# EAGLE board LS7366R_TestPRojectMultiple (EAGLE 7.5.0)
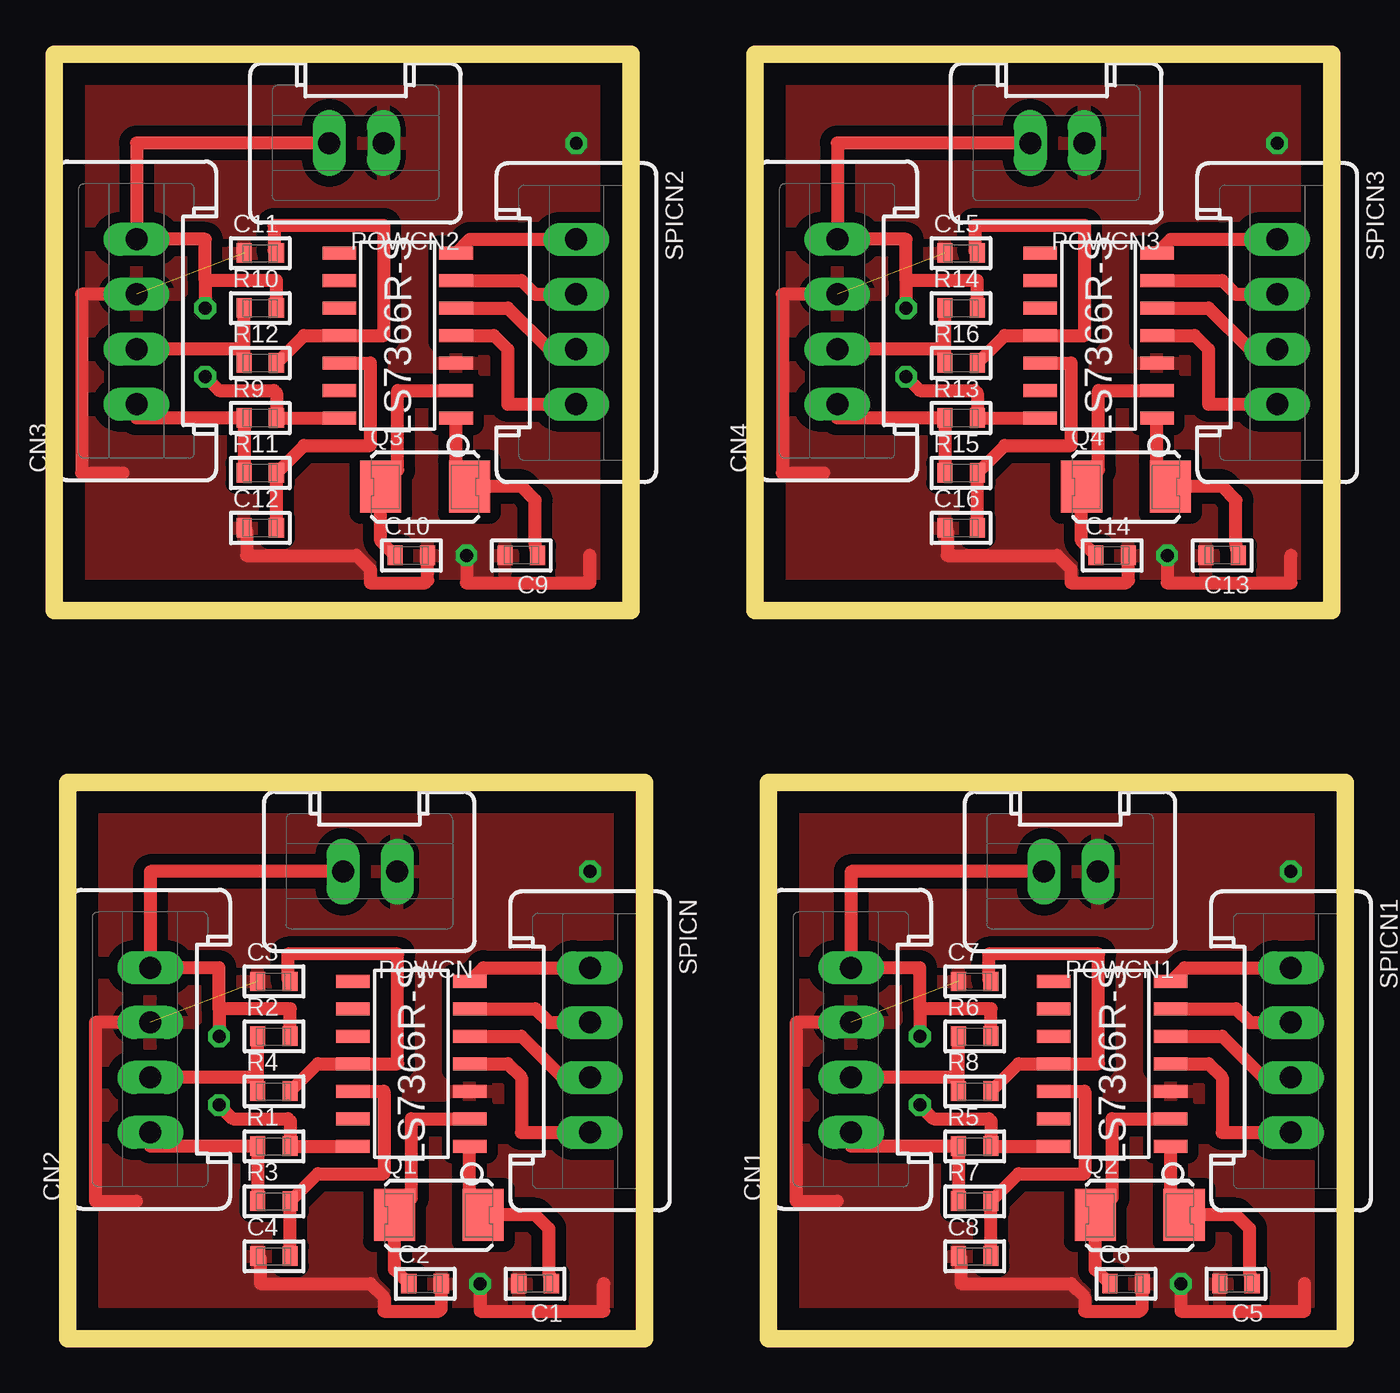
[diagram p0: board, top side]
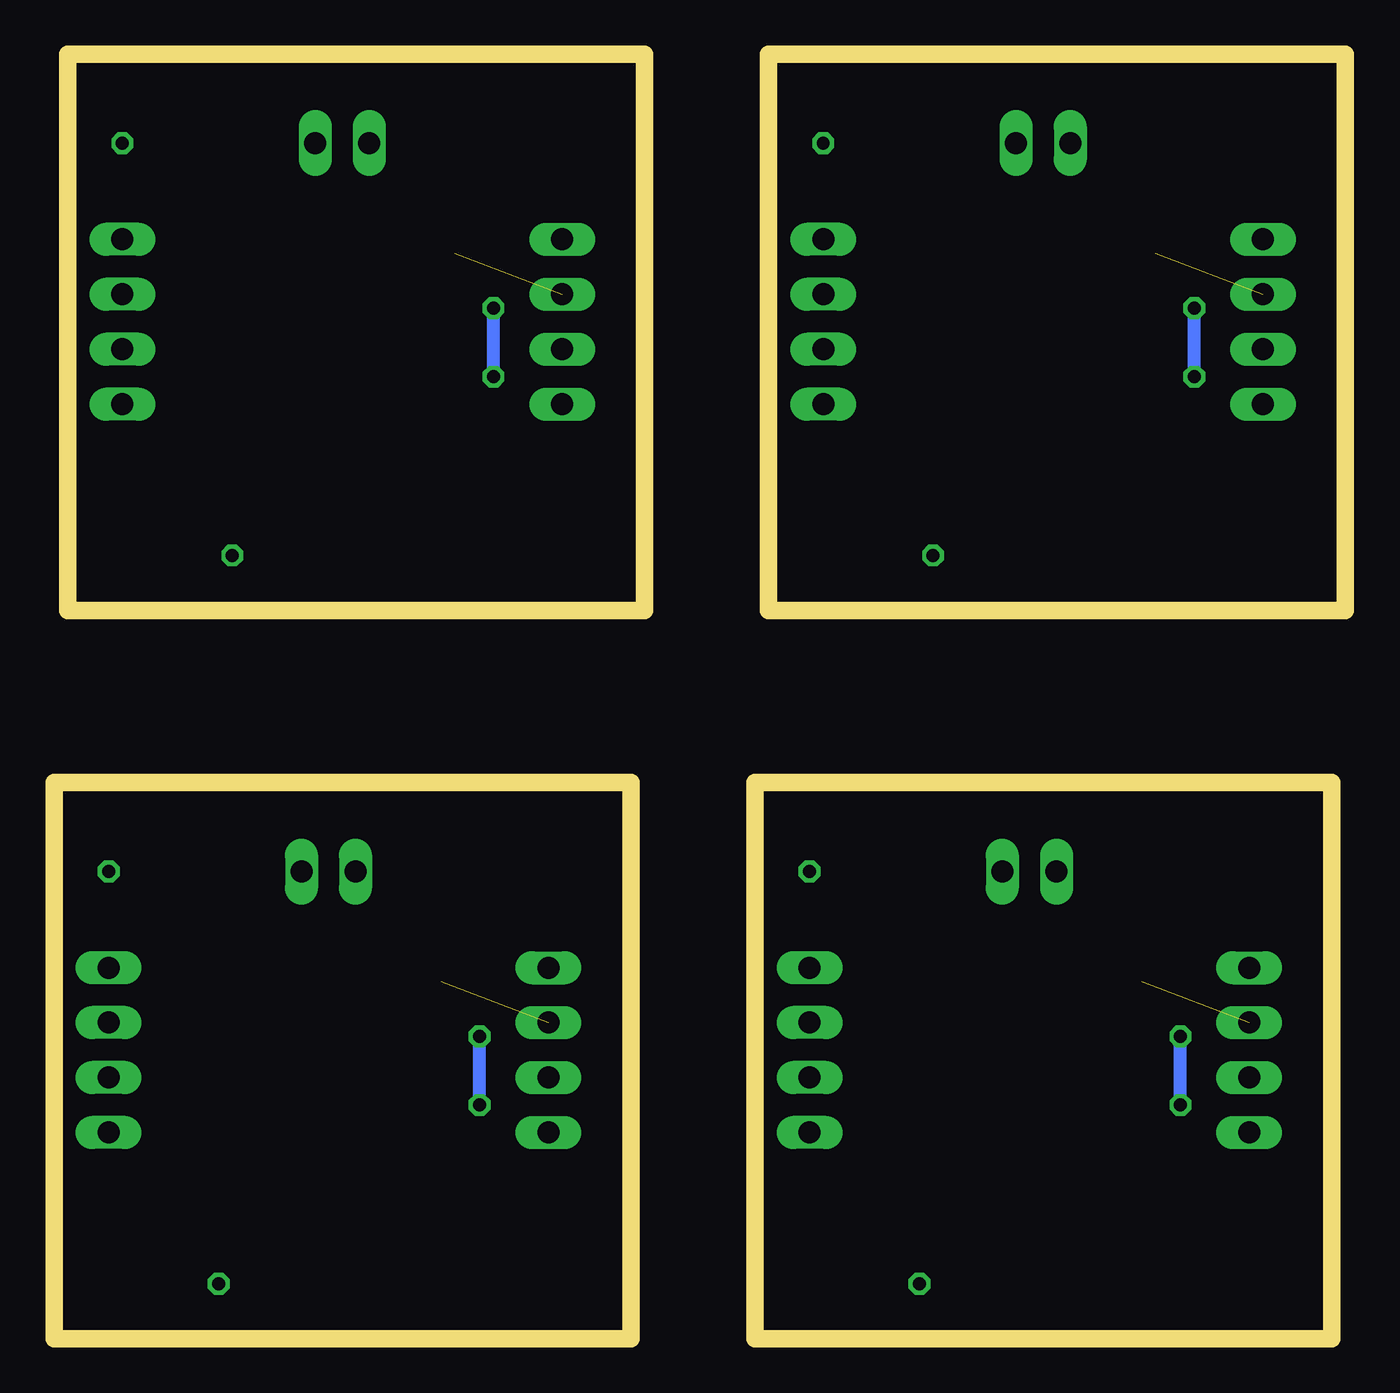
[diagram p1: board, bottom side, seen from below]

Size 59.67 x 59.36 mm. Coordinates in mm from the lower left corner, seen from the top.
Outline: 0.64,0 27.29,0 27.29,25.71 0.64,25.71 0.64,0
Outline: 33.02,0 59.67,0 59.67,25.71 33.02,25.71 33.02,0
Outline: 0,33.66 26.65,33.66 26.65,59.36 0,59.36 0,33.66
Outline: 32.38,33.66 59.03,33.66 59.03,59.36 32.38,59.36 32.38,33.66
Copper layers (1*16): Top 0.035mm / dielectric 1.5mm / Bottom 0.035mm
Design rules "default": minimum track width 10mil, minimum drill 24mil, track to track 8mil, track to pad 8mil, pad to pad 8mil, via to via 8mil, smd to smd 8mil, copper to edge 40mil, drill to drill 8mil, minimum pad ring 10mil, minimum via ring 8mil, stop-mask expansion 4mil, vias tented up to drill 0mil, thermal gap 10mil

## Footprints (pad centres in the part's own frame; a part is rotated, then mirrored left to right if it is on the bottom)
L0_0603 = smd 0.7 x 0.9: 1 -0.75,0; 2 0.75,0
L0_TUNIK-4 = drill 1.016 long: 1 3.81,0; 2 1.27,0; 3 -1.27,0; 4 -3.81,0
SOIC-14 = smd 0.6 x 1.55: 1 -3.81,-2.7; 2 -2.54,-2.7; 3 -1.27,-2.7; 4 0,-2.7; 5 1.27,-2.7; 6 2.54,-2.7; 7 3.81,-2.7; 8 3.81,2.7; 9 2.54,2.7; 10 1.27,2.7; 11 0,2.7; 12 -1.27,2.7; 13 -2.54,2.7; 14 -3.81,2.7
L0_TUNIK-2 = drill 1.016 long: 1 1.25,0; 2 -1.25,0
L0_ABM3 = smd 1.9 x 2.4: 1 -2.05,0; 2 2.05,0

## Placement (x,y rotation side)
C1  22pf  [L0_0603]  22.22,2.54 180 top
C2  22pf  [L0_0603]  17.14,2.54 0 top
C3  56pf  [L0_0603]  10.16,16.51 0 top
C4  56pf  [L0_0603]  10.16,3.81 0 top
C5  22pf  [L0_0603]  54.61,2.54 180 top
C6  22pf  [L0_0603]  49.53,2.54 0 top
C7  56pf  [L0_0603]  42.55,16.51 0 top
C8  56pf  [L0_0603]  42.55,3.81 0 top
C9  22pf  [L0_0603]  21.59,36.2 180 top
C10  22pf  [L0_0603]  16.51,36.2 0 top
C11  56pf  [L0_0603]  9.53,50.16 0 top
C12  56pf  [L0_0603]  9.53,37.46 0 top
C13  22pf  [L0_0603]  53.98,36.2 180 top
C14  22pf  [L0_0603]  48.89,36.2 0 top
C15  56pf  [L0_0603]  41.91,50.16 0 top
C16  56pf  [L0_0603]  41.91,37.46 0 top
CN1  ENCN  [L0_TUNIK-4]  36.83,13.34 90 top
CN2  ENCN  [L0_TUNIK-4]  4.45,13.34 90 top
CN3  ENCN  [L0_TUNIK-4]  3.81,46.99 90 top
CN4  ENCN  [L0_TUNIK-4]  36.2,46.99 90 top
IC1  LS7366R-S  [SOIC-14]  16.51,12.7 90 top
IC2  LS7366R-S  [SOIC-14]  48.89,12.7 90 top
IC3  LS7366R-S  [SOIC-14]  15.88,46.35 90 top
IC4  LS7366R-S  [SOIC-14]  48.26,46.35 90 top
POWCN  [L0_TUNIK-2]  14.61,21.59 180 top
POWCN1  [L0_TUNIK-2]  46.99,21.59 180 top
POWCN2  [L0_TUNIK-2]  13.97,55.24 180 top
POWCN3  [L0_TUNIK-2]  46.35,55.24 180 top
Q1  20Mhz  [L0_ABM3]  17.78,5.71 0 top
Q2  20Mhz  [L0_ABM3]  50.16,5.71 0 top
Q3  20Mhz  [L0_ABM3]  17.14,39.37 0 top
Q4  20Mhz  [L0_ABM3]  49.53,39.37 0 top
R1  2.7k  [L0_0603]  10.16,8.89 0 top
R2  2.7k  [L0_0603]  10.16,13.97 0 top
R3  2.7k  [L0_0603]  10.16,6.35 0 top
R4  2.7k  [L0_0603]  10.16,11.43 0 top
R5  2.7k  [L0_0603]  42.55,8.89 0 top
R6  2.7k  [L0_0603]  42.55,13.97 0 top
R7  2.7k  [L0_0603]  42.55,6.35 0 top
R8  2.7k  [L0_0603]  42.55,11.43 0 top
R9  2.7k  [L0_0603]  9.53,42.54 0 top
R10  2.7k  [L0_0603]  9.53,47.62 0 top
R11  2.7k  [L0_0603]  9.53,40 0 top
R12  2.7k  [L0_0603]  9.53,45.08 0 top
R13  2.7k  [L0_0603]  41.91,42.54 0 top
R14  2.7k  [L0_0603]  41.91,47.62 0 top
R15  2.7k  [L0_0603]  41.91,40 0 top
R16  2.7k  [L0_0603]  41.91,45.08 0 top
SPICN  [L0_TUNIK-4]  24.77,13.34 270 top
SPICN1  [L0_TUNIK-4]  57.15,13.34 270 top
SPICN2  [L0_TUNIK-4]  24.13,46.99 270 top
SPICN3  [L0_TUNIK-4]  56.52,46.99 270 top

## Library data of the parts
C1-C16 CN1-CN4 Q1-Q4 R1-R16 SPICN SPICN1-SPICN3 = FINAL-JibPivot
IC1-IC4 = smd-footprints
POWCN POWCN1-POWCN3 = 2axishead-Final

## Nets
+3V1: CN1.1 IC2.14 POWCN1.1 R5.2 R6.2
+3V2: CN3.1 IC3.14 POWCN2.1 R9.2 R10.2
+3V3: CN2.1 IC1.14 POWCN.1 R1.2 R2.2
+3V4: CN4.1 IC4.14 POWCN3.1 R13.2 R14.2
GND: C1.2 C2.2 C3.1 C4.1 CN2.2 IC1.3 POWCN.2
GND1: C5.2 C6.2 C7.1 C8.1 CN1.2 IC2.3 POWCN1.2
GND2: C9.2 C10.2 C11.1 C12.1 CN3.2 IC3.3 POWCN2.2
GND3: C13.2 C14.2 C15.1 C16.1 CN4.2 IC4.3 POWCN3.2
N$1: CN2.4 R1.1 R3.1
N$2: CN2.3 R2.1 R4.1
N$3: C4.2 IC1.12 R3.2
N$4: C3.2 IC1.11 R4.2
N$5: C1.1 IC1.1 Q1.2
N$6: C2.1 IC1.2 Q1.1
N$7: CN1.4 R5.1 R7.1
N$8: CN1.3 R6.1 R8.1
N$9: IC1.4 SPICN.1
N$10: IC1.5 SPICN.2
N$11: IC1.6 SPICN.3
N$12: IC1.7 SPICN.4
N$13: C8.2 IC2.12 R7.2
N$14: C7.2 IC2.11 R8.2
N$15: C5.1 IC2.1 Q2.2
N$16: C6.1 IC2.2 Q2.1
N$17: IC2.4 SPICN1.1
N$18: IC2.5 SPICN1.2
N$19: IC2.6 SPICN1.3
N$20: IC2.7 SPICN1.4
N$21: CN3.4 R9.1 R11.1
N$22: CN3.3 R10.1 R12.1
N$23: C12.2 IC3.12 R11.2
N$24: C11.2 IC3.11 R12.2
N$25: C9.1 IC3.1 Q3.2
N$26: C10.1 IC3.2 Q3.1
N$27: IC3.4 SPICN2.1
N$28: IC3.5 SPICN2.2
N$29: IC3.6 SPICN2.3
N$30: IC3.7 SPICN2.4
N$31: CN4.4 R13.1 R15.1
N$32: CN4.3 R14.1 R16.1
N$33: C16.2 IC4.12 R15.2
N$34: C15.2 IC4.11 R16.2
N$35: C13.1 IC4.1 Q4.2
N$36: C14.1 IC4.2 Q4.1
N$37: IC4.4 SPICN3.1
N$38: IC4.5 SPICN3.2
N$39: IC4.6 SPICN3.3
N$40: IC4.7 SPICN3.4

## Tracks (layer width: path | path; a pad name or v marks a point on that pad's centre or on a via)
+3V1  (via drill 0.6)
  Top 0.61: IC2.14 R5.2 43.3,10.04 43.18,10.16 40.64,10.16 v40.01,10.79 | R6.2 43.3,15.24 40.01,15.24 | 40.01,15.24 40.01,17.14 CN1.1 36.83,21.59 POWCN1.1 | 40.01,15.24 v40.01,13.97
  Bottom 0.61: v40.01,10.79 v40.01,13.97
+3V2  (via drill 0.6)
  Top 0.61: IC3.14 R9.2 10.28,43.7 10.16,43.81 7.62,43.81 v6.99,44.45 | R10.2 10.28,48.89 6.99,48.89 | 6.99,48.89 6.99,50.8 CN3.1 3.81,55.24 POWCN2.1 | 6.99,48.89 v6.99,47.62
  Bottom 0.61: v6.99,44.45 v6.99,47.62
+3V3  (via drill 0.6)
  Top 0.61: IC1.14 R1.2 10.91,10.04 10.8,10.16 8.25,10.16 v7.62,10.79 | R2.2 10.91,15.24 7.62,15.24 | 7.62,15.24 7.62,17.14 CN2.1 4.45,21.59 POWCN.1 | 7.62,15.24 v7.62,13.97
  Bottom 0.61: v7.62,10.79 v7.62,13.97
+3V4  (via drill 0.6)
  Top 0.61: IC4.14 R13.2 42.66,43.7 42.55,43.81 40.01,43.81 v39.37,44.45 | R14.2 42.66,48.89 39.37,48.89 | 39.37,48.89 39.37,50.8 CN4.1 36.2,55.24 POWCN3.1 | 39.37,48.89 v39.37,47.62
  Bottom 0.61: v39.37,44.45 v39.37,47.62
GND  (via drill 0.6)  (1 unrouted)
  Top 0.61: CN2.2 1.91,14.61 1.91,6.35 3.81,6.35 | C4.1 9.53,3.69 9.53,2.54 14.61,2.54 15.24,1.9 15.24,1.27 17.78,1.27 17.89,1.38 C2.2 | v19.68,2.54 19.68,1.27 25.4,1.27 25.4,2.54
  other vias: 24.77,21.59
  pour Top (isolate 0.508): 1.27,25.4 27.3,25.4 27.3,0 1.27,0
GND1  (via drill 0.6)  (1 unrouted)
  Top 0.61: CN1.2 34.29,14.61 34.29,6.35 36.2,6.35 | C8.1 41.91,3.69 41.91,2.54 46.99,2.54 47.62,1.9 47.62,1.27 50.16,1.27 50.28,1.38 C6.2 | v52.07,2.54 52.07,1.27 57.78,1.27 57.78,2.54
  other vias: 57.15,21.59
  pour Top (isolate 0.508): 33.66,25.4 59.69,25.4 59.69,0 33.66,0
GND2  (via drill 0.6)  (1 unrouted)
  Top 0.61: CN3.2 1.27,48.26 1.27,40 3.17,40 | C12.1 8.89,37.35 8.89,36.2 13.97,36.2 14.61,35.56 14.61,34.92 17.14,34.92 17.26,35.04 C10.2 | v19.05,36.2 19.05,34.92 24.77,34.92 24.77,36.2
  other vias: 24.13,55.24
  pour Top (isolate 0.508): 0.64,59.05 26.67,59.05 26.67,33.66 0.64,33.66
GND3  (via drill 0.6)  (1 unrouted)
  Top 0.61: CN4.2 33.66,48.26 33.66,40 35.56,40 | C16.1 41.27,37.35 41.27,36.2 46.35,36.2 46.99,35.56 46.99,34.92 49.53,34.92 49.64,35.04 C14.2 | v51.44,36.2 51.44,34.92 57.15,34.92 57.15,36.2
  other vias: 56.52,55.24
  pour Top (isolate 0.508): 33.02,59.05 59.05,59.05 59.05,33.66 33.02,33.66
N$1
  Top 0.61: R3.1 R1.1 4.45,8.89 CN2.4
N$2
  Top 0.61: R2.1 R4.1 9.41,12.07 CN2.3
N$3
  Top 0.61: C4.2 R3.2 12.18,7.62 15.24,7.62 15.24,11.43 IC1.12
N$4
  Top 0.61: R4.2 12.18,12.7 IC1.11 15.88,12.7 15.88,17.78 10.8,17.78 10.8,16.62 C3.2
N$5
  Top 0.61: IC1.1 19.21,6.33 Q1.2 22.22,5.71 22.86,5.08 22.86,3.06 C1.1
N$6
  Top 0.61: IC1.2 16.51,10.16 16.51,6.49 Q1.1 15.73,3.2 C2.1
N$7
  Top 0.61: R7.1 R5.1 36.83,8.89 CN1.4
N$8
  Top 0.61: R6.1 R8.1 41.8,12.07 CN1.3
N$9
  Top 0.61: IC1.4 20.95,12.7 21.59,12.07 21.59,9.52 SPICN.1
N$10
  Top 0.61: IC1.5 21.59,13.97 23.49,12.07 SPICN.2
N$11
  Top 0.61: IC1.6 22.22,15.24 22.86,14.61 SPICN.3
N$12
  Top 0.61: IC1.7 19.84,17.14 SPICN.4
N$13
  Top 0.61: C8.2 R7.2 44.56,7.62 47.62,7.62 47.62,11.43 IC2.12
N$14
  Top 0.61: R8.2 44.56,12.7 IC2.11 48.26,12.7 48.26,17.78 43.18,17.78 43.18,16.62 C7.2
N$15
  Top 0.61: IC2.1 51.59,6.33 Q2.2 54.61,5.71 55.24,5.08 55.24,3.06 C5.1
N$16
  Top 0.61: IC2.2 48.89,10.16 48.89,6.49 Q2.1 48.12,3.2 C6.1
N$17
  Top 0.61: IC2.4 53.34,12.7 53.98,12.07 53.98,9.52 SPICN1.1
N$18
  Top 0.61: IC2.5 53.98,13.97 55.88,12.07 SPICN1.2
N$19
  Top 0.61: IC2.6 54.61,15.24 55.24,14.61 SPICN1.3
N$20
  Top 0.61: IC2.7 52.23,17.14 SPICN1.4
N$21
  Top 0.61: R11.1 R9.1 3.81,42.54 CN3.4
N$22
  Top 0.61: R10.1 R12.1 8.78,45.72 CN3.3
N$23
  Top 0.61: C12.2 R11.2 11.55,41.27 14.61,41.27 14.61,45.08 IC3.12
N$24
  Top 0.61: R12.2 11.55,46.35 IC3.11 15.24,46.35 15.24,51.43 10.16,51.43 10.16,50.28 C11.2
N$25
  Top 0.61: IC3.1 18.57,39.99 Q3.2 21.59,39.37 22.22,38.73 22.22,36.71 C9.1
N$26
  Top 0.61: IC3.2 15.88,43.81 15.88,40.15 Q3.1 15.09,36.86 C10.1
N$27
  Top 0.61: IC3.4 20.32,46.35 20.95,45.72 20.95,43.18 SPICN2.1
N$28
  Top 0.61: IC3.5 20.95,47.62 22.86,45.72 SPICN2.2
N$29
  Top 0.61: IC3.6 21.59,48.89 22.22,48.26 SPICN2.3
N$30
  Top 0.61: IC3.7 19.21,50.8 SPICN2.4
N$31
  Top 0.61: R15.1 R13.1 36.2,42.54 CN4.4
N$32
  Top 0.61: R14.1 R16.1 41.16,45.72 CN4.3
N$33
  Top 0.61: C16.2 R15.2 43.93,41.27 46.99,41.27 46.99,45.08 IC4.12
N$34
  Top 0.61: R16.2 43.93,46.35 IC4.11 47.62,46.35 47.62,51.43 42.55,51.43 42.55,50.28 C15.2
N$35
  Top 0.61: IC4.1 50.96,39.99 Q4.2 53.98,39.37 54.61,38.73 54.61,36.71 C13.1
N$36
  Top 0.61: IC4.2 48.26,43.81 48.26,40.15 Q4.1 47.48,36.86 C14.1
N$37
  Top 0.61: IC4.4 52.7,46.35 53.34,45.72 53.34,43.18 SPICN3.1
N$38
  Top 0.61: IC4.5 53.34,47.62 55.24,45.72 SPICN3.2
N$39
  Top 0.61: IC4.6 53.98,48.89 54.61,48.26 SPICN3.3
N$40
  Top 0.61: IC4.7 51.59,50.8 SPICN3.4